# Altium PCB Street_light_driver.PcbDoc
Units mm, origin at the board's own origin, x right, y up, seen from the top; angles counter-clockwise.
Board outline 34 x 123 mm, 2 copper layers (Top Layer, Bottom Layer); 37 components, 17 nets, 81 pads, 37 vias.
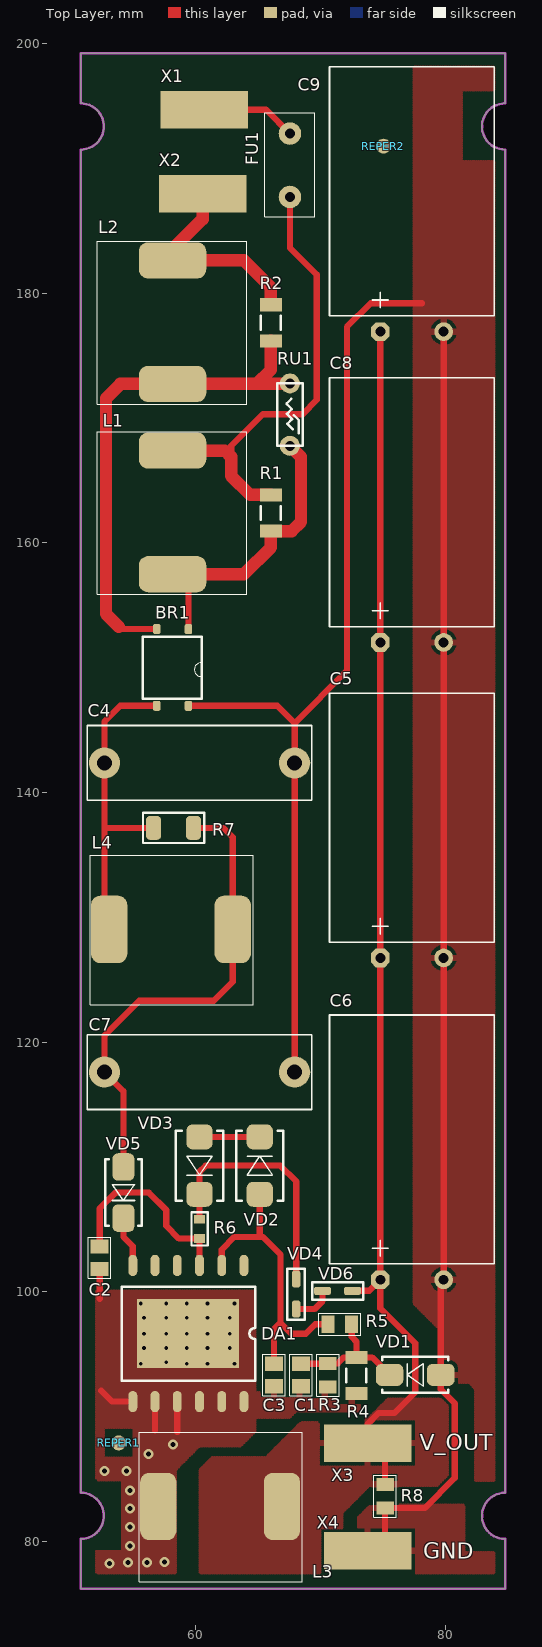
[diagram p0: Top Layer view]
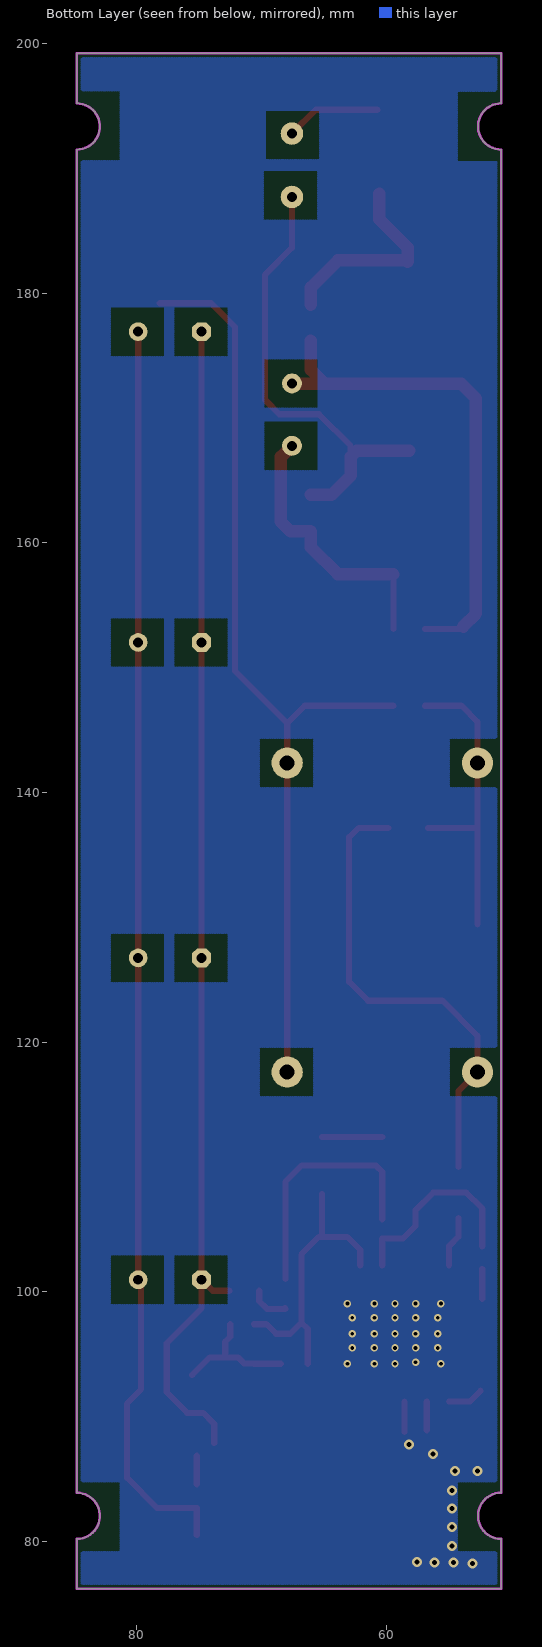
[diagram p1: Bottom Layer view, seen from below]

## Layer stack, top to bottom
Top Solder: solder mask 0.0102, Solder Resist, Dk 3.5
Top Layer: signal copper 0.0356
Dielectric 1: dielectric 0.32, FR-4, Dk 4.8
Bottom Layer: signal copper 0.0356
Bottom Solder: solder mask 0.0102, Solder Resist, Dk 3.5

## Board outline
50.8,76.2 50.8,80.2 ccw(c50.809,82.05) 50.8,83.9 50.8,191.5 ccw(c50.809,193.35) 50.8,195.2 50.8,199.2 84.8,199.2 84.8,195.2 ccw(c84.8,193.35) 84.8,191.5 84.8,83.9 ccw(c84.8,82.05) 84.8,80.2 84.8,76.2

## Design rules (kind name [scope] priority, off if disabled: settings)
Clearance [All] p1: gap=0.2
PolygonConnect PolygonConnect_1 [InComponent('DA1') OR IsVia OR InComponent('L3')] p1: connectstyle=Direct reliefconductorwidth=0.254 reliefentries=4 polygonreliefangle="90 Angle" airgapwidth=0.254
PolygonConnect [All] p2: connectstyle=Relief reliefconductorwidth=0.5 reliefentries=4 polygonreliefangle="90 Angle" airgapwidth=0.3
RoutingVias [All] p1: holewidth=0.3 width=0.6 viastyle="Through Hole" minholewidth=0.711 minwidth=1.27 maxholewidth=0.711 maxwidth=1.27
SolderMaskExpansion [All] p1: expansion=0.102
Width [All] p1: maxlimit=3 minlimit=0.2 preferedwidth=0.5
30 further rules are at their usual default settings.

## Components (designator, comment, footprint, x,y, rotation, side; value= is the part's Value field where it differs from the comment)
BR1 "MB6S" TO-269AA 59.436,146.939 r180 top
C1 "10uF" CC0805 68.453,94.234 r270 top
C2 "1uF" CC0805 52.324,103.632 r270 top
C3 "10uF" CC0805 66.294,94.234 r270 top
C4 "100nFx630V" CAP_630V_100NF 60.325,142.367 r0 top
C5 "100uFx100V" CAP_ELEC_10x21 77.343,126.746 r180 top
C6 "100uFx100V" CAP_ELEC_10x21 77.343,100.965 r180 top
C7 "100nFx630V" CAP_630V_100NF 60.325,117.602 r0 top
C8 "100uFx100V" CAP_ELEC_10x21 77.343,152.019 r180 top
C9 "100uFx100V" CAP_ELEC_10x21 77.343,176.911 r180 top
DA1 "LNK460KG" eSOP-12 63.881,102.108 r270 top
FU1 "Fuse Belfuse_507-1181" FUSE_BELLFUSE 67.564,192.786 r270 top
L1 "CDRH129HF-102MC" "IND CDRH129" 58.166,167.386 r180 top
L2 "CDRH129HF-102MC" "IND CDRH129" 58.166,182.626 r180 top
L3 "CDRH129HF-331MC" "IND CDRH129" 57.023,82.804 r270 top
L4 "CDRH129HF-102MC" "IND CDRH129" 53.086,129.032 r270 top
R1 "3k3" RC1206 66.04,163.83 r270 top
R2 "3k3" RC1206 66.04,179.07 r270 top
R3 "*20E" RC0805 70.612,94.264 r270 top
R4 "1E5" RC1206 72.898,94.742 r270 top
R5 "3k3" RC0805 70.612,97.409 r0 top
R6 "*36k" RC0603 60.325,104.267 r90 top
R7 "3k6" RC1206-2M 56.642,137.16 r0 top
R8 "100k" RC0805 75.184,82.677 r90 top
REPER1 "REPER1.2" REPER1.2 53.848,87.9 r90 top
REPER2 "REPER1.2" REPER1.2 75.057,191.77 r90 top
RU1 "KLS6-07D" Varistor_7mm 67.564,167.767 r0 top
VD1 "ES1J" SMA 77.597,93.345 r180 top
VD2 "*SMBJ18A" SMB 65.151,110.109 r270 top
VD3 "*SMBJ90A" SMB 60.325,110.109 r90 top
VD4 "BAV21WS" SOD-323 68.072,99.822 r90 top
VD5 "ES1J" SMA 54.229,107.95 r270 top
VD6 "BAV21WS" SOD-323 71.374,100.076 r180 top
X1 "PIN_7x3mm_SMD" PIN_7x3mm_SMD 60.706,194.691 r0 top
X2 "PIN_7x3mm_SMD" PIN_7x3mm_SMD 60.579,187.96 r0 top
X3 "PIN_7x3mm_SMD" PIN_7x3mm_SMD 73.787,87.884 r0 top
X4 "PIN_7x3mm_SMD" PIN_7x3mm_SMD 73.787,79.248 r0 top

## Footprints (in the part's own frame and the unit in brackets; to place one, negate y for a bottom-side part, rotate by r counter-clockwise, add the part's x,y. Pads: shape width x height; smd on the part's side, far side on the other; paste and mask are expansions set on the pad)
CAP_630V_100NF [mm]
  round 2.5 hole 1.2: 1(-7.62,0) 2(7.62,0)
  silkscreen extent -9,-3 9,3
CAP_ELEC_10x21 [mm]
  oct 1.5x1.5 hole 0.8: 1(2.54,0)
  round 1.5 hole 0.8: 2(-2.54,0)
  silkscreen extent -6.6,-21.21 6.6,-1.27, body extent -6.53,-21.19 6.53,0.3, height 13.03
CC0805 [mm]
  rect 1.15x1.45 smd paste-25.4: 1(0,0) 2(1.8,0)
  silkscreen extent -0.75,-0.9 2.55,0.9
eSOP-12 [mm]
  oval 1.7x0.71 smd: 1(0,0) 2(0,-1.78) 3(0,-3.56) 4(0,-5.34) 5(0,-7.12) 6(0,-8.9) 7(10.9,-8.9) 8(10.9,-7.12) 9(10.9,-5.34) 10(10.9,-3.56) 11(10.9,-1.78) 12(10.9,0)
  rect 5.51x8.15 smd: 13(5.45,-4.475)
  silkscreen extent 1.68,-9.79 9.22,0.89, body extent 1.68,-9.8 9.2,0.9, height 2.3
FUSE_BELLFUSE [mm]
  round 1.8 hole 0.8: 1(0,0) 2(5.08,0)
  silkscreen extent -1.68,-2 6.68,2
"IND CDRH129" [mm]
  rrect50% 5.4x2.9 smd: 1(0,0) 2(0,9.9)
  silkscreen extent -5.95,-1.53 6.02,11.53
PIN_7x3mm_SMD [mm]
  rect 7x3 smd: 1(0,0)
RC0603 [mm]
  rect 0.7x0.9 smd paste-25.4: 1(0,0) 2(1.549,0)
  silkscreen extent -0.55,-0.65 2.1,0.65
RC0805 [mm]
  rect 1.05x1.4 smd paste-25.4: 1(0,0) 2(1.9,0)
  silkscreen extent -0.72,-0.89 2.62,0.89
RC1206 [mm]
  rect 1.05x1.75 smd paste-25.4: 1(0,0) 2(2.9,0)
  silkscreen extent 0.9,-0.8 2,0.8
RC1206-2M [mm]
  rrect50% 1.2x1.9 smd: 1(0,0) 2(3.2,0)
  silkscreen extent -0.84,-1.22 4.06,1.22, body extent 0,-0.8 3.2,0.8, height 0.6
REPER1.2 [mm]
  round 1.2 smd paste-25.4 mask-25.4: 1(0,0)
  Top Layer pour cut-out: -1.2,-1.2 1.2,-1.2 1.2,1.2 -1.2,1.2
SMA [mm]
  rrect50% 2.2x1.75 smd: 1(-2.05,0) 2(2.05,0)
  silkscreen extent -2.65,-1.45 2.65,1.45, body extent -2.5,-1.35 2.5,1.35, height 2.15
SMB [mm]
  rrect50% 2x2.1 smd: 1(2.3,0) 2(-2.3,0)
  silkscreen extent -2.8,-1.9 2.8,1.9, body extent -2.65,-1.85 2.65,1.85, height 2.2
SOD-323 [mm]
  rrect50% 1.35x0.65 smd: 1(-1.2,0) 2(1.2,0)
  silkscreen extent -2.05,-0.7 2.02,0.72
TO-269AA [mm]
  rrect50% 0.6x0.8 smd: 1(0,-6.15) 2(2.54,-6.15) 3(2.54,0) 4(0,0)
  silkscreen extent -1.07,-5.55 3.67,-0.58
Varistor_7mm [mm]
  round 1.6 hole 0.8: 1(0,5) 2(0,0)
  silkscreen extent -1.02,0 1.02,5

## Part data
C1 C2 C3: library part CC0805, "CC0805"
C4 C7: library part Cap_HV
C5 C6 C8 C9: library part CAP0.5, "CAP0.5"
L1 L2 L3 L4: library part "IND CDRH129HF"
R1 R2 R4 R7: library part RC1206, "RC1206"
R3 R5 R8: library part RC0805, "RC0805"
R6: library part RC0603, "RC0603"
RU1: library part Varistor_KLS6-07D431K
VD1 VD5: library part SS14, "Schottky Rectifier"
VD2 VD3: library part SMBJ, "SMBJ"

## Via types
v1: diameter 0.6, hole 0.3, Top Layer to Bottom Layer, 25 vias
v2: diameter 0.8, hole 0.4, Top Layer to Bottom Layer, 12 vias

## Nets (pads, with @x,y where several pads share a name; then routed paths per layer and width w, separated by ;. In a path a pad name is that pad's centre, name@x,y a point inside that pad or via, vN(x,y) a via of type N, cw(c..) or ccw(c..) an arc to the next point about the centre after c; other vN are vias at no path point)
GND: BR1.4 C4.2 C5.2 C6.2 C7.2 C8.2 C9.2 R8.1 VD1.1 X4.1 | length 178.1
  Top Layer w0.5: BR1.4 66.548,146.939 67.945,145.542 ; C7.2 C4.2 67.945,145.542 ; X4.1@75.184,80.518 R8.1 78.359,82.677 80.772,85.09 80.772,91.059 79.647,92.184 VD1.1 C6.2@79.647,100.729 ; 78.15,179.197 74.041,179.197 72.136,177.292 72.136,149.733 67.945,145.542 ; C6.2 C5.2 C8.2 C9.2
NetBR1_1: BR1.1 L1.2 R1.2 RU1.2 | length 22.4
  Top Layer w0.5: BR1.1 L1.2@59.436,157.486
  Top Layer w1: L1.2@59.436,157.486 63.887,157.486 66.04,159.639 R1.2 67.712,160.93 68.453,161.671 68.453,166.878 RU1.2
NetBR1_2: BR1.2 L2.2 R2.2 RU1.1 | length 41
  Top Layer w0.5: 53.848,153.289 54.048,153.089 BR1.2
  Top Layer w1: 53.848,153.289 52.832,154.305 52.832,171.577 53.981,172.726 L2.2 64.903,172.726 ; R2.2 66.04,173.863 64.903,172.726 ; RU1.1 67.523,172.726 64.903,172.726
NetBR1_3: BR1.3 C4.1 L4.1 R7.1 | length 24.8
  Top Layer w0.5: L4.1@52.705,129.413 C4.1 52.705,145.669 53.975,146.939 BR1.3 ; 52.832,137.16 R7.1
NetC1_1: C1.1 R3.1 R4.1 R5.2 VD1.2 | length 10.7
  Top Layer w0.5: C1.1 70.582,94.234 R3.1 71.404,94.264 71.887,94.747 72.512,94.747 72.517,94.742 R4.1 ; R5.2 72.512,96.398 72.898,96.012 R4.1 ; VD1.2 74.15,94.742 R4.1
NetC1_2: C1.2 C2.2 C3.2 DA1.7 DA1.8 DA1.9 DA1.10 DA1.11 DA1.12 DA1.13 L3.1 R3.2 R4.2 | length 10
  Top Layer w0.5: 52.324,99.45 C2.2 ; 52.451,92.075 53.318,91.208 DA1.7 ; 56.761,88.908 DA1.8 ; 58.541,88.779 DA1.9
  other v1: 55.626,94.234 59.309,94.234 60.96,94.234 63.119,94.234 57.658,94.361 55.88,95.504 57.658,95.504 59.309,95.504 60.96,95.504 62.738,95.504 55.88,96.647 57.658,96.647 59.309,96.647 60.96,96.647 62.738,96.647 55.88,97.917 57.658,97.917 59.309,97.917 60.96,97.917 62.738,97.917 55.626,99.06 57.658,99.06 59.309,99.06 60.96,99.06 63.119,99.06
  other v2: 53.1,78.232 54.61,78.3 56.134,78.3 57.531,78.359 54.75,79.629 54.737,81.15 54.737,82.65 54.75,84.074 52.705,85.65 54.483,85.65 56.25,86.995 58.2,87.757
NetC2_1: C2.1 DA1.3 R6.1 | length 16
  Top Layer w0.5: C2.1 52.324,106.68 53.594,107.95 56.261,107.95 57.658,106.553 57.658,105.283 58.674,104.267 R6.1 60.321,104.263 DA1.3
NetC3_1: C3.1 DA1.2 R5.1 VD2.1 | length 23.7
  Top Layer w0.5: DA1.2 62.101,103.376 63.119,104.394 65.405,104.394 66.802,102.997 66.802,97.536 ; 65.151,104.521 VD2.1 ; C3.1 66.294,97.028 66.802,97.536 ; R5.1 69.596,97.409 68.834,96.647 67.691,96.647 66.802,97.536
NetC5_1: C5.1 C6.1 C8.1 C9.1 L3.2 R8.2 VD6.1 X3.1 | length 97.4
  Top Layer w0.5: VD6.1 73.914,100.076 C6.1 ; X3.1 73.787,89.408 74.676,90.297 75.946,90.297 77.597,91.948 77.597,95.885 74.803,98.679 C6.1 ; C9.1 C8.1 C5.1 C6.1 ; R8.2 X3.1@75.184,86.868
NetC7_1: C7.1 L4.2 R7.2 VD5.1 | length 38.2
  Top Layer w0.5: VD5.1 54.229,116.078 C7.1 52.705,120.523 55.499,123.317 61.468,123.317 62.986,124.835 L4.2 62.986,136.404 62.23,137.16 R7.2
NetDA1_6: DA1.6 VD5.2 | length 4.1
  Top Layer w0.5: VD5.2 54.229,104.394 54.981,103.642 DA1.6
NetFU1_1: FU1.1 X1.1 | length 7.6
  Top Layer w0.5: X1.1 65.659,194.691 FU1.1
NetFU1_2: FU1.2 L1.1 R1.1 | length 36.7
  Top Layer w0.5: 62.865,166.878 62.865,167.767 65.405,170.307 68.58,170.307 69.723,171.45 69.723,181.483 67.564,183.642 FU1.2
  Top Layer w1: L1.1 62.357,167.386 62.865,166.878 62.865,165.354 64.389,163.83 R1.1
NetL2_1: L2.1 R2.1 X2.1 | length 16.4
  Top Layer w1: L2.1@58.293,182.499 L2.1@58.293,182.626 ; X2.1 60.579,185.928 58.293,183.642 L2.1@58.293,182.626 ; R2.1 66.04,180.467 63.881,182.626 L2.1@58.293,182.626
NetR6_2: R6.2 VD3.2 VD4.2 | length 20.1
  Top Layer w0.5: R6.2 VD3.2 60.325,109.601 60.833,110.109 66.802,110.109 68.072,108.839 VD4.2
NetVD2_2: VD2.2 VD3.1 | length 4.8
  Top Layer w0.5: VD3.1 VD2.2
NetVD4_1: VD4.1 VD6.2 | length 3.3
  Top Layer w0.5: VD4.1@68.129,98.679 VD4.1 69.539,98.622 70.174,99.257 VD6.2
pads on no net: DA1.1 DA1.4 DA1.5 REPER1.1 REPER2.1

## Polygon pours and split planes (outlines as drawn)
NetC1_2 on Top Layer "TOP" (hatched 90Degree grid 0.15 track 0.2, remove dead copper, pour order 0): 64.77,100.076 54.102,100.076 53.721,100.076 53.213,100.076 52.07,100.076 52.07,94.488 52.07,94.107 52.07,88.519 52.07,77.47 58.42,77.47 58.42,85.725 59.69,86.995 60.325,87.63 63.5,87.63 63.627,87.63 64.77,88.773
NetC5_1 on Top Layer "TOP" (hatched 90Degree grid 0.15 track 0.2, remove dead copper, pour order 2): 60.325,77.47 60.325,85.725 61.341,86.741 65.786,86.741 65.786,86.868 67.691,88.773 68.453,89.535 69.977,89.535 73.533,89.535 75.438,91.44 81.28,91.44 81.28,84.455 74.041,84.455 73.914,84.455 71.755,82.296 71.755,77.47
GND on Top Layer "TOP" (hatched 90Degree grid 0.15 track 0.2, remove dead copper, pour order 4): 73.025,77.47 73.025,81.915 74.041,82.931 82.423,82.931 82.423,92.202 81.915,92.71 79.629,92.71 79.629,96.901 77.47,99.06 77.47,112.141 77.47,198.12 83.947,198.12 83.947,77.47
NetC1_2 on Top Layer "TOP" (hatched 90Degree grid 0.15 track 0.2, remove dead copper, pour order 6): 73.152,91.948 73.15,91.95 64.77,91.95 64.77,89.85 64.836,89.916 67.31,89.916 67.564,89.916 68.199,90.551 68.326,90.424 70.485,90.424 73.025,90.424 73.152,90.551
NetC1_2 on Bottom Layer "BOT" (hatched 90Degree grid 0.15 track 0.2, remove dead copper, pour order 8): 50.8,199.2 50.8,76.2 84.8,76.2 84.8,199.2

## Keep-outs
Keep-Out Layer:
  lines w0.2: 50.8,191.5 ccw(c50.809,193.35) 50.8,195.2 50.8,199.2 84.8,199.2 84.8,195.2 ccw(c84.8,193.35) 84.8,191.5 84.8,83.9 ccw(c84.8,82.05) 84.8,80.2 84.8,76.2 50.8,76.2 50.8,80.2 ccw(c50.809,82.05) 50.8,83.9 50.8,191.5 ; 50.8,191.5 50.8,191.5

## Other copper
Top Layer:
  pour cut-out: 50.713,196.225 54.25,196.225 54.25,190.525 50.788,190.525 50.713,190.525 50.713,190.6
  pour cut-out: 50.712,84.9 54.125,84.9 54.125,79.2 50.787,79.2 50.712,79.2 50.712,79.275
  pour cut-out: 81.525,84.85 84.906,84.85 84.906,79.15 82.369,79.15 81.525,79.15 81.525,79.85
  pour cut-out: 81.325,196.25 84.881,196.25 84.881,190.55 82.344,190.55 81.325,190.55 81.325,190.975
Bottom Layer:
  pour cut-out: 50.797,196.2 54.354,196.2 54.354,190.5 51.816,190.5 50.797,190.5 50.797,190.925
  pour cut-out: 50.797,84.821 54.354,84.821 54.354,79.121 51.816,79.121 50.797,79.121 50.797,79.546
  pour cut-out: 81.277,84.821 84.834,84.821 84.834,79.121 82.296,79.121 81.277,79.121 81.277,79.546
  pour cut-out: 81.28,196.271 84.836,196.271 84.836,190.571 82.298,190.571 81.28,190.571 81.28,190.996
  pour cut-out: 77.724,178.943 82.169,178.943 82.169,174.879 77.724,174.879
  pour cut-out: 72.644,178.943 77.089,178.943 77.089,174.879 72.644,174.879
  pour cut-out: 72.644,102.997 77.089,102.997 77.089,98.933 72.644,98.933
  pour cut-out: 77.724,102.997 82.169,102.997 82.169,98.933 77.724,98.933
  pour cut-out: 77.724,128.778 82.169,128.778 82.169,124.714 77.724,124.714
  pour cut-out: 77.724,154.051 82.169,154.051 82.169,149.987 77.724,149.987
  pour cut-out: 65.405,169.799 69.85,169.799 69.85,165.735 65.405,165.735
  pour cut-out: 65.405,174.799 69.85,174.799 69.85,170.735 65.405,170.735
  pour cut-out: 65.468,189.865 69.913,189.865 69.913,185.801 65.468,185.801
  pour cut-out: 65.278,194.691 69.723,194.691 69.723,190.627 65.278,190.627
  pour cut-out: 77.724,178.943 82.169,178.943 82.169,174.879 77.724,174.879
  pour cut-out: 72.644,154.051 77.089,154.051 77.089,149.987 72.644,149.987
  pour cut-out: 72.644,128.778 77.089,128.778 77.089,124.714 72.644,124.714
  pour cut-out: 65.786,119.634 70.231,119.634 70.231,115.57 65.786,115.57
  pour cut-out: 50.546,119.634 54.991,119.634 54.991,115.57 50.546,115.57
  pour cut-out: 50.546,144.399 54.991,144.399 54.991,140.335 50.546,140.335
  pour cut-out: 73.692,178.182 75.946,178.182 75.946,175.782 73.692,175.782
  pour cut-out: 78.772,178.182 81.026,178.182 81.026,175.782 78.772,175.782
  pour cut-out: 66.453,174.038 68.707,174.038 68.707,171.638 66.453,171.638
  pour cut-out: 66.453,169.038 68.707,169.038 68.707,166.638 66.453,166.638
  pour cut-out: 73.692,153.29 75.946,153.29 75.946,150.89 73.692,150.89
  pour cut-out: 78.772,153.29 81.026,153.29 81.026,150.89 78.772,150.89
  pour cut-out: 65.786,144.399 70.231,144.399 70.231,140.335 65.786,140.335
  pour cut-out: 73.692,128.017 75.946,128.017 75.946,125.617 73.692,125.617
  pour cut-out: 78.772,128.017 81.026,128.017 81.026,125.617 78.772,125.617
  pour cut-out: 73.692,102.236 75.946,102.236 75.946,99.836 73.692,99.836
  pour cut-out: 78.772,102.236 81.026,102.236 81.026,99.836 78.772,99.836

## Silkscreen, mask and mechanical layers (free items; w line width, h text height)
Top Overlay:
  text "V_OUT" at 77.978,87.3 h1.3
  text "GND" at 78.232,78.613 h1.3
Mechanical 3:
  lines w0.1: 165.227,76.2 165.227,137.795 ; 167.386,137.668 246.126,137.668

## Dimensions
243.923,82.169 to 251.714,82.042 on Mechanical 3
165.227,76.2 to 245.8,76.2 on Mechanical 3
245.8,199.2 to 245.872,137.668 on Mechanical 3
50.712,82.087 to 50.8,76.2 on Mechanical 3
84.8,199.2 to 245.8,199.2 on Mechanical 3
50.8,199.2 to 50.8,76.2 on Mechanical 3
50.8,199.2 to 84.8,199.2 on Mechanical 3
50.8,76.2 to 50.8,199.2 on Mechanical 1
50.8,76.2 to 84.8,76.2 on Mechanical 1

## Panel: embedded boards
"..\Street_light_LED\Street_light_LED.PcbDoc" at 84.8,76.2, 1 rows x 1 columns, spacing 63.5 x 38.1, rotation 0